# Altium PCB RANGE-FINDER-NODE-PCB.PcbDoc
Units mm, origin at the board's own origin, x right, y up, seen from the top; angles counter-clockwise.
Board outline 30 x 30 mm, 2 copper layers (Top Layer, Bottom Layer), stack 1.671 mm thick; 45 components, 34 nets, 158 pads, 63 vias.
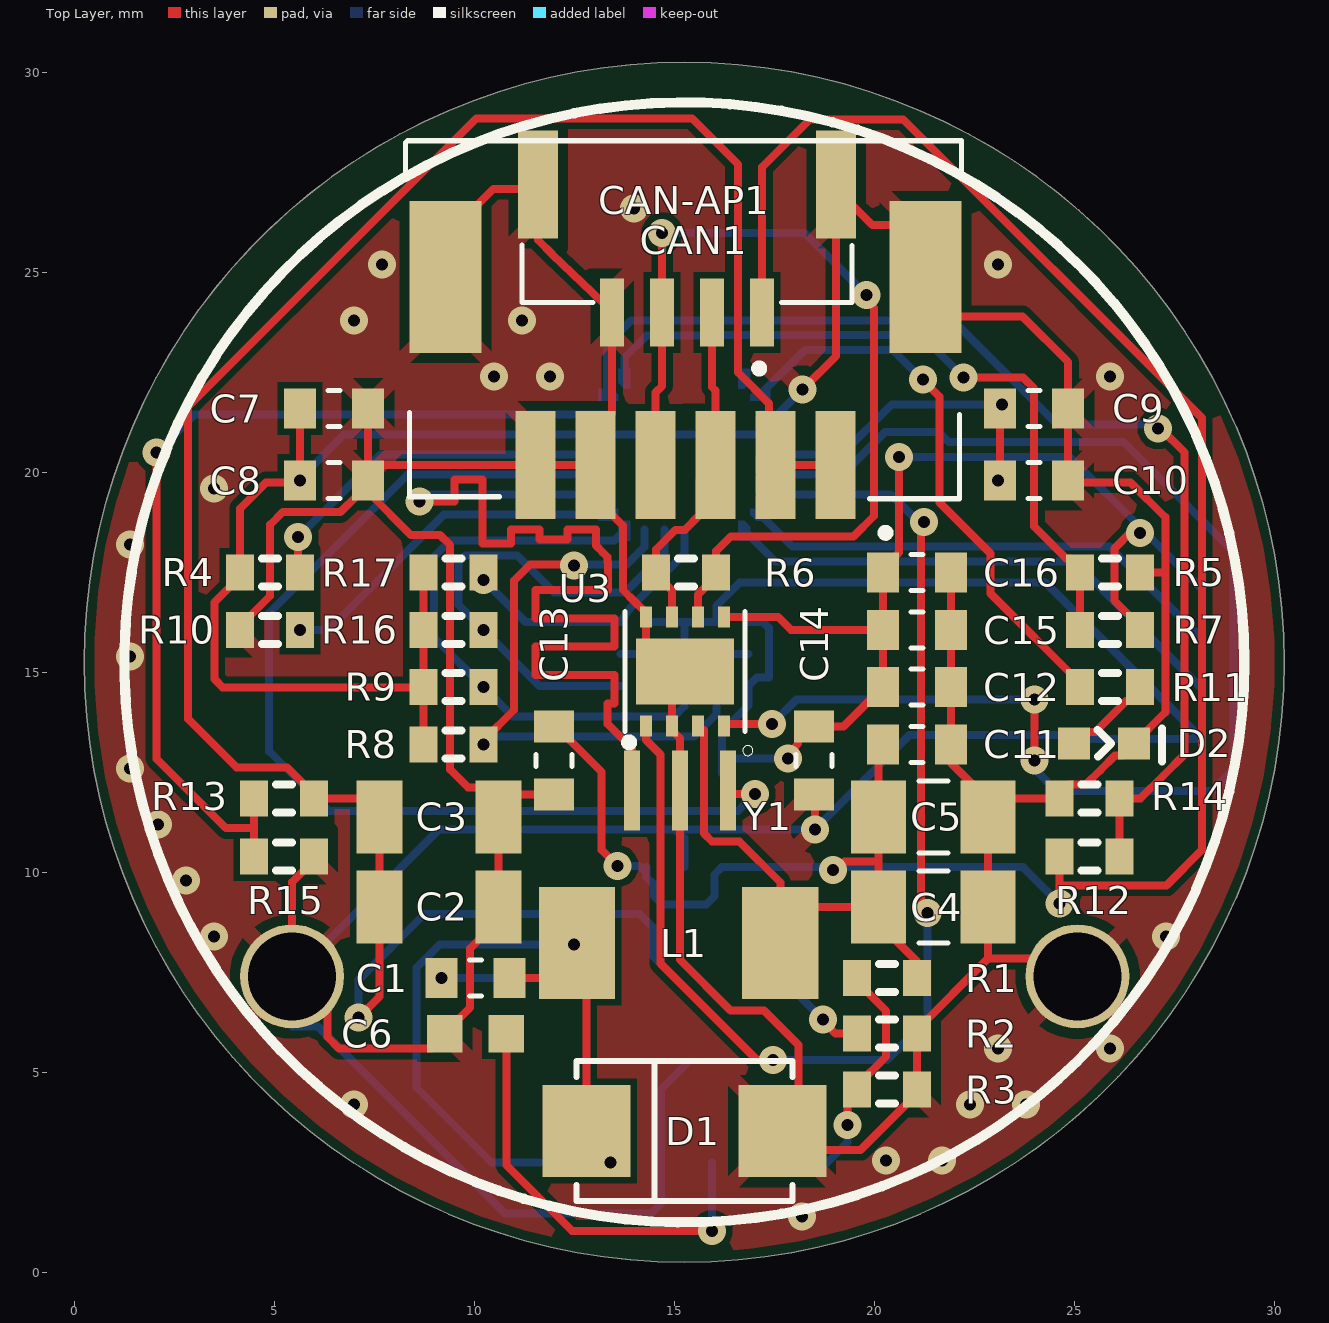
[diagram p0: Top Layer view]
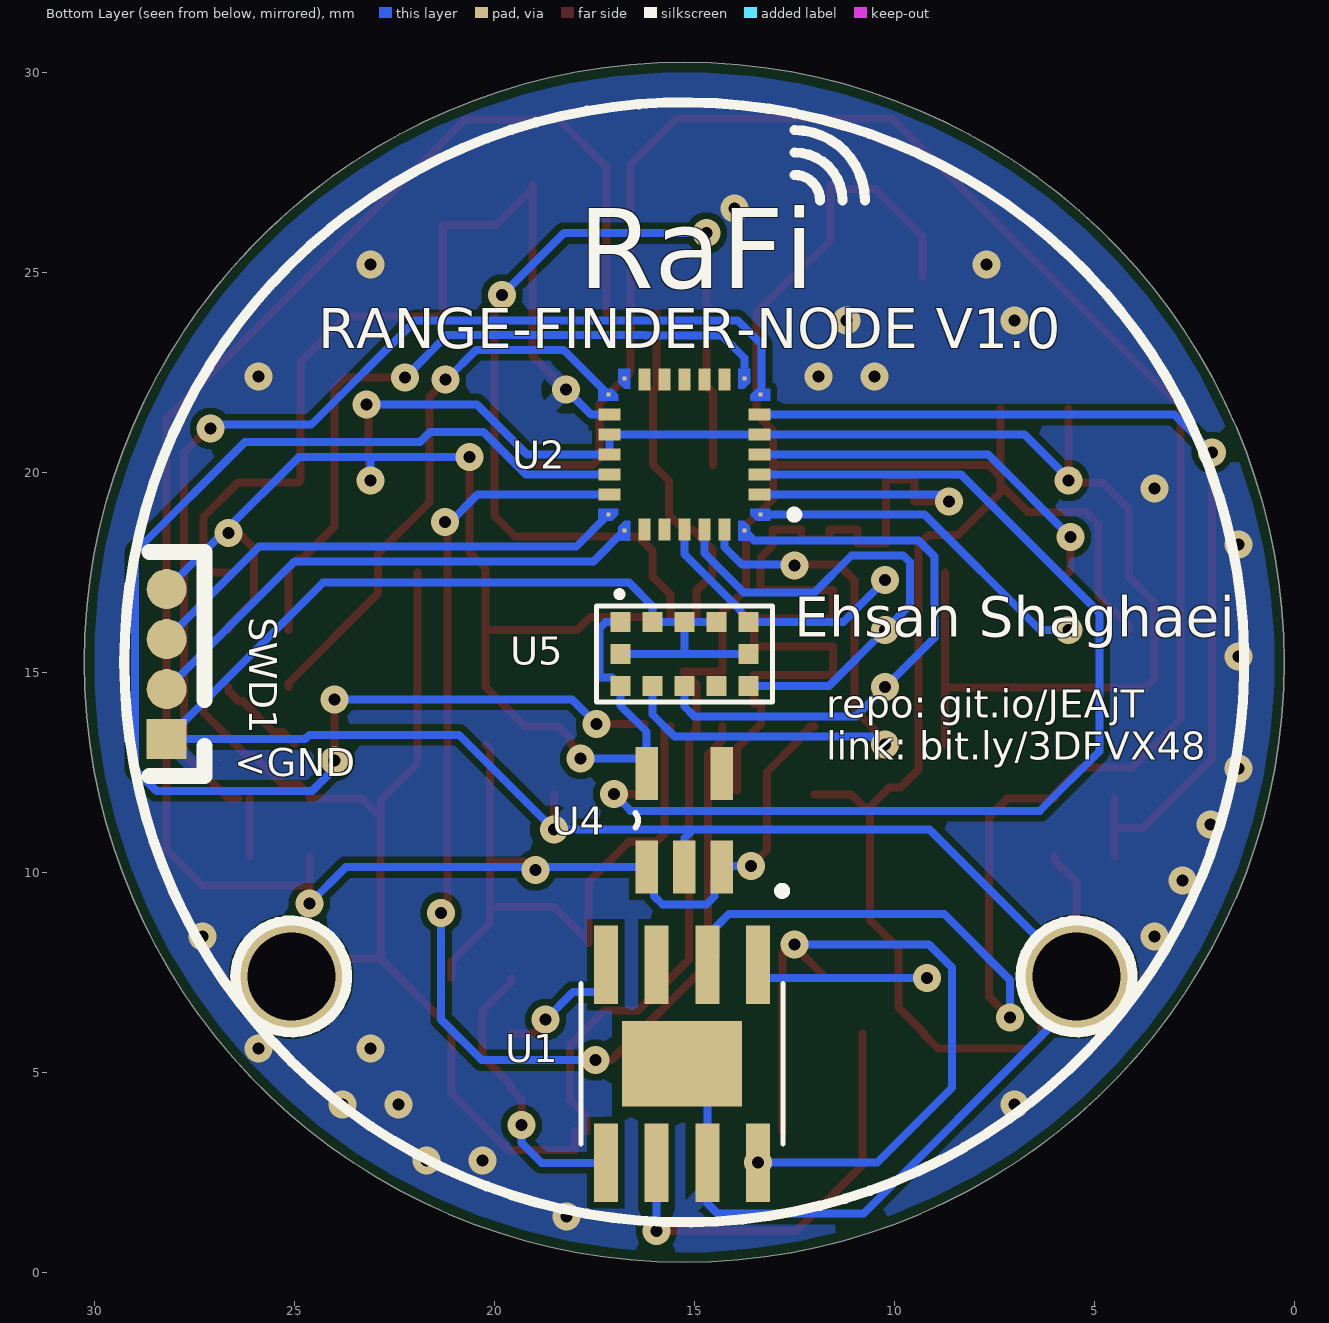
[diagram p1: Bottom Layer view, seen from below]
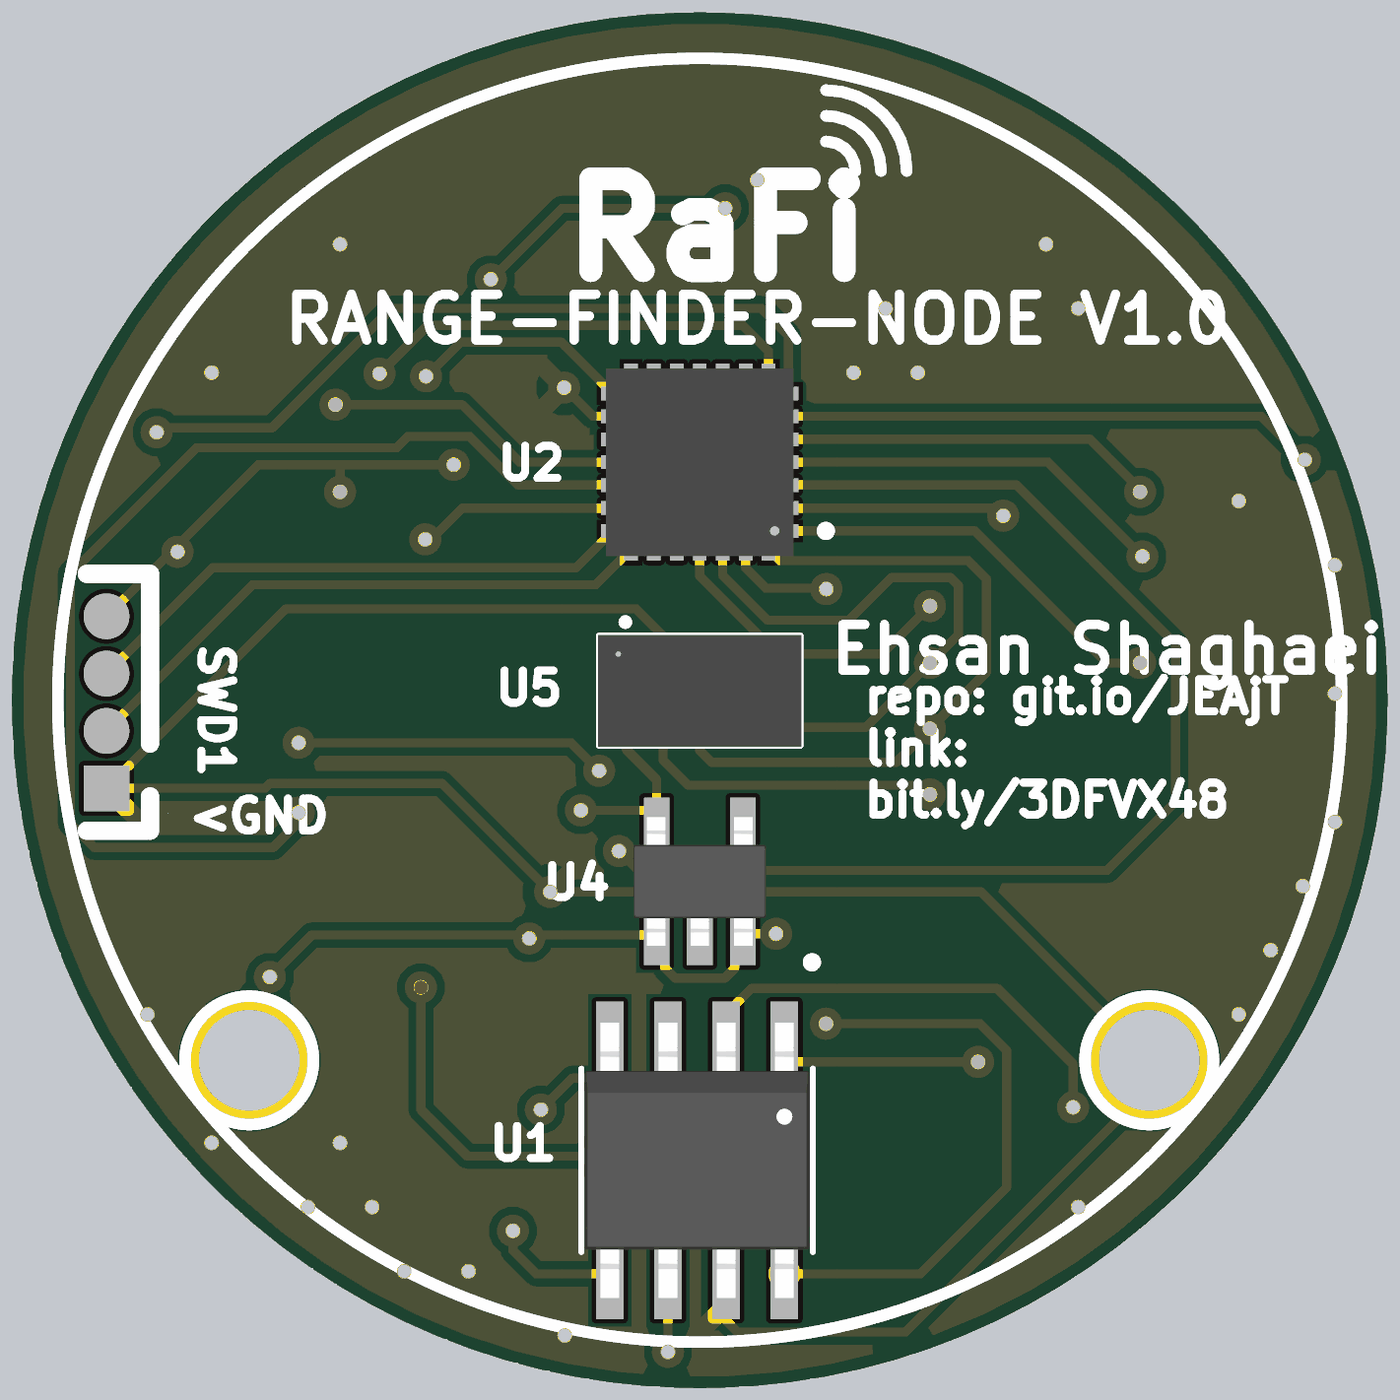
[diagram p2: 3D render of the assembled board from below, using the file's embedded part models]

## Layer stack, top to bottom
Top Solder: solder mask 0.0102, Solder Resist, Dk 3.5
Top Layer: signal copper 0.0356
Dielectric 1: dielectric 1.6, FR-4, Dk 4.8
Bottom Layer: signal copper 0.0356
Bottom Solder: solder mask 0.0102, Solder Resist, Dk 3.5

## Board outline
15.254,0.254 cw(c15.254,15.254) 0.254,15.254 cw(c15.254,15.254) 15.254,30.254 cw(c15.254,15.254) 30.254,15.254 cw(c15.254,15.254)

## Design rules (kind name [scope] priority, off if disabled: settings)
BoardOutlineClearance [All] p1: gap=0.25 ignorepadtopadclearanceinfootprint=FALSE
Clearance [All] p1: gap=0.17 ignorepadtopadclearanceinfootprint=FALSE
ComponentClearance [All] p1: gap=0 collisioncheckmode=3 verticalgap=0 showdistances=FALSE
DiffPairsRouting [All] p1: maxlimit=0.254 minlimit=0.18 mostfreqgap=0.2 toplayer_minwidth=0.2 toplayer_maxwidth=0.2 toplayer_prefwidth=0.2 bottomlayer_minwidth=0.2 bottomlayer_maxwidth=0.2 bottomlayer_prefwidth=0.2 maxuncoupledlength=12.7
FanoutControl Fanout_SOIC [IsSOIC] p3: bgadir=Out bgaviamode=Closest fanoutstyle=Auto fanoutdirection=Alternating viagrid=0.025 // Fanout_SOIC (Default Rule)
FanoutControl Fanout_Small [(CompPinCount < 5)] p4: bgadir=Out bgaviamode=Closest fanoutstyle=Auto fanoutdirection=OutThenIn viagrid=0.025 // Fanout_Small (Default Rule)
FanoutControl Fanout_Default [All] p5: bgadir=In bgaviamode=Closest fanoutstyle=Auto fanoutdirection=Alternating viagrid=0.025 // Fanout_Default (Default Rule)
HoleSize [All] p1: absolutevalues=TRUE maxlimit=4.5 minlimit=0.3 maxpercent=80.000 minpercent=20.000
HoleToHoleClearance [All] p1: gap=0.4 allowstackedmicrovias=TRUE
MatchedLengths [All] p1: tolerance=0.3 checknetsindiffpair=FALSE checkdiffpairvsdiffpair=TRUE checkxsignals=TRUE checkothers=TRUE
MinimumSolderMaskSliver [All] p1: minsoldermaskwidth=0.15
PlaneClearance [All] p1: clearance=0.2
PlaneConnect [All] p1: planeconnectstyle=Relief reliefexpansion=0.5 reliefentries=4 reliefconductorwidth=0.2 reliefairgap=0.25
PolygonConnect PolygonConnect_1 [InNet('GND')] p1: connectstyle=Relief reliefconductorwidth=0.4 reliefentries=4 polygonreliefangle="45 Angle" airgapwidth=0.254
PolygonConnect [All] p2: connectstyle=Relief reliefconductorwidth=0.3 reliefentries=4 polygonreliefangle="90 Angle" airgapwidth=0.16
RoutingCorners [All] p1: cornerstyle=45-Degree minsetback=2.5 maxsetback=2.5
RoutingPriority [All] p1 off: routingpriority=0
RoutingVias [All] p1: holewidth=0.3 width=0.7 viastyle="Through Hole" minholewidth=0.3 minwidth=0.7 maxholewidth=0.8 maxwidth=1.2
SilkToSilkClearance [All] p1: silktosilkclearance=0
SilkToSolderMaskClearance [IsPad] p1: minsilkscreentomaskgap=0 clearancetoexposedcopper=TRUE
SolderMaskExpansion [All] p1: expansion=0.1 istentingtop=FALSE soldermaskfromhole=TRUE
Width [All] p1: maxlimit=5 minlimit=0.17 preferedwidth=0.2
16 further rules are at their usual default settings.

## Classes and differential pairs
net class 6sc: OSC_IN OSC_OUT
net class Route: 3.3 5V ADC_5V ADC_VIN BOOT0 CAN_N CAN_P CAN_RXD CAN_TXD FB INT LED MISO MOSI NetC1_1 NetC1_2 NetC6_2 NetD2_A NetR2_2 NetU1_3 NSS0 NSS1 OSC_IN OSC_OUT SCK SCL SDA STM_NRST SWDIO SWLK VERSION Vin XSHUT
component class VL53L0X: C15 C16 R16 R17 U5
component class STM32F042G6: C7 C8 C9 C10 C11 C12 C13 C14 D2 R4 R5 R6 R7 R8 R9 R10 R11 R12 R13 R14 R15 SWD1 U2 U3 U4 Y1
component class RANGE-FINDER-NODE-SCH: CAN1 CAN-AP1
component class DCDC-LMR16030: C1 C2 C3 C4 C5 C6 D1 L1 R1 R2 R3 U1
differential pair CAN: +CAN_P -CAN_N

## Components (designator, comment, footprint, x,y, rotation, side; value= is the part's Value field where it differs from the comment)
C1 "GX035C104MAT2-500" *CAPC1608X90 10.033,7.366 r180 top value=0.1u
C2 "GRM31CR71H225KA88L" *CAP3216X125N 9.123,9.14 r0 top value=2.2u
C3 "GRM31CR71H225KA88L" *CAP3216X125N 9.123,11.39 r0 top value=2.2u
C4 "GRM31CR61A476KE15L" *CAPC3216X125N 21.479,9.14 r180 top value=47u
C5 "GRM31CR61A476KE15L" *CAPC3216X125N 21.479,11.39 r180 top value=47u
C6 "GRM188R71C105KA12D" CAPC1608X90N 10.033,5.969 r0 top value=1u
C7 "GX035C104MAT2-500" *CAPC1608X90 6.5,21.6 r0 top value=0.1u
C8 "GX035C104MAT2-500" *CAPC1608X90 6.5,19.8 r0 top value=0.1u
C9 "GX035C104MAT2-500" *CAPC1608X90 24,21.6 r0 top value=0.1u
C10 "GX035C104MAT2-500" *CAPC1608X90 24,19.8 r0 top value=0.1u
C11 "GX035C104MAT2-500" *CAPC1608X90 21.07,13.2 r0 top value=0.1u
C12 "GX035C104MAT2-500" *CAPC1608X90 21.07,14.633 r0 top value=0.1u
C13 "GX035C104MAT2-500" *CAPC1608X90 12,12.8 r270 top value=0.1u
C14 "GX035C104MAT2-500" *CAPC1608X90 18.5,12.8 r270 top value=0.1u
C15 "GX035C104MAT2-500" *CAPC1608X90 21.07,16.067 r180 top value=100nF
C16 "GX035C104MAT2-500" *CAPC1608X90 21.07,17.5 r180 top value=4.7uF
CAN1 "502585-0670" MOLEX_502585-0670 15.286,20.393 r180 top
CAN-AP1 "SM04B-GHS-TB(LF)(SN)-" JST_SM04B-GHS-TB(LF)(SN)- 15.325,26.275 r180 top
D1 "SK56" *SMB_P6SMB62AT3G(Primary) 15.254,3.537 r180 top
D2 "0603-LED-BLUE" *LEDM1608X80_LTE-C1906R-14(Primary) 25.75,13.225 r180 top
L1 "IHLP2020BZER100M01" IHLP 15.113,8.236 r180 top
R1 "Res3" J1-0603 20.32,7.366 r0 top value=56k
R2 "Res3" J1-0603 20.32,5.969 r180 top value=56k
R3 "RC0603FR-0710KL" J1-0603 20.32,4.572 r180 top value=10k
R4 "RC0603FR-0710KL" J1-0603 4.9,17.5 r0 top value=10k
R5 "RC0603FR-0710KL" J1-0603 25.9,17.5 r180 top value=10k
R6 "Res3" J1-0603 15.3,17.5 r180 top value=120
R7 "RC0603FR-0710KL" J1-0603 25.9,16.067 r0 top value=10k
R8 "RC0603FR-0710KL" J1-0603 9.483,13.2 r180 top value=10k
R9 "RC0603FR-0710KL" J1-0603 9.483,14.633 r180 top value=10k
R10 "RC0603FR-0710KL" J1-0603 4.9,16.067 r0 top value=10k
R11 "Res3" J1-0603 25.9,14.633 r0 top value=330
R12 "RC0603FR-0710KL" J1-0603 25.38,10.4 r180 top value=10k
R13 "RC0603FR-0710KL" J1-0603 5.25,11.85 r0 top value=180K
R14 "RC0603FR-0710KL" J1-0603 25.38,11.85 r0 top value=10k
R15 "RC0603FR-0710KL" J1-0603 5.25,10.4 r180 top value=10k
R16 "RC0603FR-0710KL" J1-0603 9.483,16.067 r180 top value=10k
R17 "RC0603FR-0710KL" J1-0603 9.483,17.5 r180 top value=10k
SWD1 "BM04B-GHS-TBT(LF)(SN)(N)" JST_PAD 31.544,15.21 r270 bottom
U1 "LMR16030SDDAR" "*SOIC127P600X170-9N - duplicate" 15.312,5.219 r270 bottom
U2 "STM32F042G6U6" STM32F042G6U6_UFQFPN4x4 15.254,20.447 r0 bottom
U3 "TJA1042" SOT782-1 15.271,15.029 r0 top
U4 "SPX3819M5-L-3-3/TR" *SOT95P280X145-5N 15.254,11.303 r90 bottom value=3V3
U5 "VL53L0X" SENSOR_VL53L0X 15.254,15.463 r180 bottom
Y1 "CSTCE8M00G55-R0" *OSC_CSTCE8M00G55-R0 15.141,12.046 r180 top

## Footprints (in the part's own frame and the unit in brackets; to place one, negate y for a bottom-side part, rotate by r counter-clockwise, add the part's x,y. Pads: shape width x height; smd on the part's side, far side on the other; paste and mask are expansions set on the pad)
*CAP3216X125N [mm]
  rect 1.15x1.82 smd: 1(-1.485,0) 2(1.485,0)
  body extent -1.6,-0.8 1.6,0.8, height 1.22
*CAPC1608X90 [mm]
  rect 0.8x1 smd: 1(-0.85,0) 2(0.85,0)
  silkscreen extent -0.15,-0.45 0.15,0.45, body extent -0.8,-0.4 0.8,0.41, height 0.88
*CAPC3216X125N [mm]
  rect 1.38x1.82 smd: 1(-1.369,0) 2(1.369,0)
  silkscreen extent -0.36,-0.9 0.36,0.9, body extent -1.6,-0.87 1.6,0.87, height 1.71
*LEDM1608X80_LTE-C1906R-14(Primary) [mm]
  rect 0.8x0.8 smd: A(0.75,0) C(-0.75,0)
  silkscreen extent -1.45,-0.38 0.16,0.45, body extent -0.8,-0.3 0.8,0.3, height 1.15
*OSC_CSTCE8M00G55-R0 [mm]
  rect 0.4x2 smd: 1(-1.2,0) 2(0,0) 3(1.2,0)
  silkscreen extent -1.83,-1.13 -1.57,-0.87, body extent -1.6,-0.65 1.6,0.65, height 1
*SMB_P6SMB62AT3G(Primary) [mm]
  rect 2.2x2.3 smd: A(-2.45,0) C(2.45,0)
  silkscreen extent -2.7,-1.75 2.7,1.75, body extent -2.72,-1.78 2.72,1.78, height 2.49
"*SOIC127P600X170-9N - duplicate" [mm]
  rect 1.97x0.6 smd: 1(-2.475,1.905) 2(-2.475,0.635) 3(-2.475,-0.635) 4(-2.475,-1.905) 5(2.475,-1.905) 6(2.475,-0.635) 7(2.475,0.635) 8(2.475,1.905)
  rect 2.13x3 smd: 9(0,0)
  silkscreen extent -4.42,-2.53 2,2.6, body extent -3,-2.45 3,2.45, height 1.69
*SOT95P280X145-5N [mil]
  rect 52x22 smd: 1(-46,37) 2(-46,0) 3(-46,-37) 4(46,-37) 5(46,37)
  silkscreen extent -7,46 7,48, body extent -55,-57 55,57, height 57
CAPC1608X90N [mm]
  rect 0.89x0.93 smd: 1(-0.77,0) 2(0.77,0)
  body extent -0.8,-0.4 0.8,0.4, height 0.9
IHLP [mil]
  rect 75x110 smd: 1(-100,0) 2(100,0)
  body extent -100,-100 100,100, height 79
J1-0603 [mm] "Chip Resistor, Body 1.6x0.8mm, IPC High Density"
  rect 0.7x0.9 smd: 1(-0.75,0) 2(0.75,0)
  silkscreen extent -0.2,-0.35 0.2,0.35, body extent -0.85,-0.48 0.85,0.48, height 0.9
JST_PAD [mm]
  rect 1x1 smd: 1(1.875,3.35)
  round 1 smd: 2(0.625,3.35) 3(-0.625,3.35) 4(-1.875,3.35)
  silkscreen extent -2.8,2.92 2.8,4.7
JST_SM04B-GHS-TB(LF)(SN)- [mm]
  rect 0.6x1.7 smd: 1(-1.875,2.275) 2(-0.625,2.275) 3(0.625,2.275) 4(1.875,2.275)
  rect 1x2.7 smd: SH1(-3.725,-0.925) SH2(3.725,-0.925)
  silkscreen extent -4.12,-2.03 4.13,3.77
MOLEX_502585-0670 [mm]
  rect 1x2.7 smd: 1(-3.75,0.2) 2(-2.25,0.2) 3(-0.75,0.2) 4(0.75,0.2) 5(2.25,0.2) 6(3.75,0.2)
  rect 1.8x3.8 smd: P1(-6,-4.5) P2(6,-4.5)
  silkscreen extent -6.9,-7.9 7,2
SENSOR_VL53L0X [mm]
  rect 0.5x0.5 smd: 1(-1.6,0.8) 2(-0.8,0.8) 3(0,0.8) 4(0.8,0.8) 5(1.6,0.8) 6(1.6,0) 7(1.6,-0.8) 8(0.8,-0.8) 9(0,-0.8) 10(-0.8,-0.8) 11(-1.6,-0.8) 12(-1.6,0)
  silkscreen extent -2.2,-1.2 2.2,1.57, body extent -2.22,-1.22 2.22,1.22, height 1.04
SOT782-1 [mm]
  rect 0.3x0.525 smd: 1(-0.975,-1.362) 2(-0.325,-1.362) 3(0.325,-1.362) 4(0.975,-1.362) 5(0.975,1.362) 6(0.325,1.362) 7(-0.325,1.362) 8(-0.975,1.362)
  rect 2.45x1.65 smd paste-2: P$9(0,0)
  silkscreen extent -1.5,-1.88 1.5,1.5, body extent -1.52,-1.52 1.52,1.52, height 0.85
STM32F042G6U6_UFQFPN4x4 [mm]
  rect 0.1x0.1 smd paste-1 mask+0: 1(-1.9,1.5) 7(-1.9,-1.5) 8(-1.5,-1.9) 14(1.5,-1.9) 15(1.9,-1.5) 21(1.9,1.5) 22(1.5,1.9) 28(-1.5,1.9)
  rect 0.55x0.3 smd: 2(-1.875,1) 3(-1.875,0.5) 4(-1.875,0) 5(-1.875,-0.5) 6(-1.875,-1) 16(1.875,-1) 17(1.875,-0.5) 18(1.875,0) 19(1.875,0.5) 20(1.875,1)
  rect 0.3x0.55 smd: 9(-1,-1.875) 10(-0.5,-1.875) 11(0,-1.875) 12(0.5,-1.875) 13(1,-1.875) 23(1,1.875) 24(0.5,1.875) 25(0,1.875) 26(-0.5,1.875) 27(-1,1.875)
  Top Layer region: -1.65,1.5 -1.65,1.35 -2.15,1.35 -2.15,1.65 -1.8,1.65
  Top Layer region: -1.65,-1.5 -1.8,-1.65 -2.15,-1.65 -2.15,-1.35 -1.65,-1.35
  Top Layer region: -1.35,-2.15 -1.65,-2.15 -1.65,-1.8 -1.5,-1.65 -1.35,-1.65
  Top Layer region: 1.65,-1.8 1.65,-2.15 1.35,-2.15 1.35,-1.65 1.5,-1.65
  Top Layer region: 2.15,-1.65 1.8,-1.65 1.65,-1.5 1.65,-1.35 2.15,-1.35
  Top Layer region: 2.15,1.35 1.65,1.35 1.65,1.5 1.8,1.65 2.15,1.65
  Top Layer region: 1.65,1.8 1.5,1.65 1.35,1.65 1.35,2.15 1.65,2.15
  Top Layer region: -1.35,1.65 -1.5,1.65 -1.65,1.8 -1.65,2.15 -1.35,2.15
  silkscreen extent -2.85,1.4 -2.65,1.6, body extent -2.04,-2.04 2.05,2.05, height 0.61

## Part data
C1 C7 C8 C9 C10 C11 C12 C13 C14 C15 C16: "Cap Thin Film 0.1uf 50v 0603", Package="0603 AVX", MF=AVX, Pacage Metric=1608, SnapEDA_Link=https://www.snapeda.com/parts/GX035C104MAT2-500/AVX/view-part/?ref=snap, Type=SMD
  C1 C7 C8 C9 C10 C11 C12 C15 C16: MP="GX035C104MAT2-500 or CL10B104JB8NNNC"
  C13 C14: MP=GX035C104MAT2-500
C2 C3: "1206 2.2 uF 50 V В±10% Tolerance X7R SMT Multilayer Ceramic Capacitor", Package="1206 Murata", MF="Murata Electronics", MP=GRM31CR71H225KA88L, SnapEDA_Link=https://www.snapeda.com/parts/GRM31CR71H225KA88L/Murata%20Electronics%20North%20America/view-part/?ref=snap, Type=SMD
C4 C5: "Multilayer Ceramic Capacitor, GRM Series, 47 - F, - 10%, X5R, 10 V, 1206 [3216 Metric]", Package="1206 Murata Electronics", MF="Murata Electronics", MP=GRM31CR61A476KE15L, SnapEDA_Link=https://www.snapeda.com/parts/GRM31CR61A476KE15L/Murata%20Electronics%20North%20America/view-part/?ref=snap, Type=SMD
C6: "SMD Capacitor X7R(EIA) with Capacitance: 1.0uF Tol. 10%. Rated Voltage: 16Vdc", Package=0603, ChipDip_Link=https://www.chipdip.ru/product/grm188r71c105ka12d, HelpURL=https://static.chipdip.ru/lib/428/DOC005428493.pdf, MF="Murata Electronics", MP=GRM188R71C105KA12D, Pacage Metric=1608, SnapEDA_Link=https://www.snapeda.com/parts/GRM188R71C105KA12D/Murata%20Electronics%20North%20America/view-part/228340/?ref=snap, Type=SMD
CAN1: "1.50mm Pitch, CLIK-Mate PCB Receptacle, Single Row, Surface Mount, Right-Angle, Tin Plating, Positive Lock, 6 Circuits, Natural", Package=None, MF=Molex, MP=502585-0670, SnapEDA_Link=https://www.snapeda.com/parts/502494-0670/Molex/view-part/?ref=snap, System=Connector, Type=SMD
CAN-AP1: "Connector Header Surface Mount, Right Angle 4 position 0.049 _1.25mm_", Package=None, ChipDip_Link=https://www.chipdip.ru/product/sm04b-ghs-tb-lf-sn-gh-1.25mm-header-side-ent, HelpURL=http://www.farnell.com/datasheets/2082975.pdf, MF="JST Sales", MP=SM04B-GHS-TB(LF)(SN), SnapEDA_Link=https://www.snapeda.com/parts/SM04B-GHS-TB%28LF%29%28SN%29-/JST%20Sales%20America%20Inc./view-part/2759740/?ref=snap, System=Connector
D1: "Диод Шоттки 5А 60В [SMB / DO-214AA]", Package="DO-214 Littelfuse", ChipDip_Link=https://www.chipdip.ru/product/sk56, MF="Littelfuse Inc.", MP=SK56, SnapEDA_Link=https://www.snapeda.com/parts/P6SMB62AT3G/Littelfuse%20Inc./view-part/?ref=snap, Type=SMD
D2: library part LTE-C1906R-14, "LED IrLED Chip LED 2-Pin SMD T/R", Package="0603 Lite-On", MP=0603-LED-BLUE, SnapEDA_Link=https://www.snapeda.com/parts/LTE-C1906R-14/Lite-On%20Inc./view-part/?ref=snap, Type=SMD
L1: "10ÂµH Shielded Molded Inductor 2.3A 199mOhm Max Nonstandard", Package="Nonstandard Vishay", ChipDip_Link=https://www.chipdip.ru/product/ihlp2020bzer100m11-inductor-ihlp-smd-2020-10, HelpURL=http://www.vishay.com/docs/34253/ihlp-2020bz-01.pdf, MF="Vishay Dale", MP=IHLP2020BZER100M01, SnapEDA_Link=https://www.snapeda.com/parts/IHLP2020BZER100M01/Vishay%20Dale/view-part/44808/?ref=snap, Type=SMD
R1 R2 R11: "Resistor", Package=R0603, Pacage Metric=1608, Type=SMD
  R1 R2: ChipDip_Link=https://www.chipdip.ru/product0/9000079754, HelpURL=https://www.chipdip.ru/product0/9000079754, MP=RC0603FR-0756KL
  R11: ChipDip_Link=https://www.chipdip.ru/product0/9000079628, HelpURL=https://www.chipdip.ru/product0/9000079628, MP=RC0603FR-07330RL
R3 R4 R5 R7 R8 R9 R10 R12 R13 R14 R15 R16 R17: "10 kOhms 1 0.1 W 1 10 W Chip Resistor 0603 1608 Metric Thick Film", Package=R0603, ChipDip_Link=https://www.chipdip.ru/product0/9000079736, HelpURL=https://www.chipdip.ru/product0/9000079736, MF="Yageo or NXP", MP="10K 1% 0603", Pacage Metric=1608, SnapEDA_Link=https://www.snapeda.com/parts/RC0603FR-0710KL/Yageo/view-part/?ref=dk&t=RC0603FR-0710KL&con_ref=None, Type=SMD
R6: "120 Ohms 1 0.1 W 1 10 W Chip Resistor 0603 1608 Metric Thick Film", Package=R0603, ChipDip_Link=https://www.chipdip.ru/product0/9000079618, HelpURL=https://www.chipdip.ru/product0/9000079618, MP=RC0603FR-07120RL, Pacage Metric=1608, Type=SMD
SWD1: "Conn Shrouded Header HDR 4 POS 1.25mm Solder ST SMD Reel", Package=None, Instructions="Do not install", MF="JST Sales", MP=SM04B-GHS-TB(LF)(SN), SnapEDA_Link=https://www.snapeda.com/parts/BM04B-GHS-TBT%28LF%29%28SN%29%28N%29/JST%20Sales%20America%20Inc./view-part/?ref=snap, System=Connector, Type=SMD
U1: "LMR16030SDDAR, Conv DC-DC 4.3V to 60V Step Down Single-Out 1V to 50V 3A Automotive 8-Pin HSOP EP T/R", Package="PowerSOIC-8 Texas Instruments", ChipDip_Link=https://www.chipdip.ru/product1/8003448566, HelpURL=https://www.ti.com/lit/ds/symlink/lmr16030.pdf, MF="Texas Instruments", MP=LMR16030SDDAR, SnapEDA_Link=https://www.snapeda.com/parts/TPS54560DDA/Texas%20Instruments/view-part/?ref=snap, Type=SMD
U2: "ARMÂ® CortexÂ®-M0 STM32F0 Microcontroller IC 32-Bit 48MHz 32KB _32K x 8_ FLASH 28-UFQFPN _4x4_", Package="UFQFN-28 STMicroelectronics", Availability=Unavailable, ChipDip_Link=https://www.chipdip.ru/product/stm32f042g6u6, Datasheet=https://static.chipdip.ru/lib/914/DOC005914773.pdf, Designer="Ehsan Shaghaei", MF=STMicroelectronics, MP=STM32F042G6U6, Price=None, SnapEDA_Link=https://www.snapeda.com/parts/STM32F042G6U6/STMicroelectronics/view-part/225452/?ref=snap
U3: "1/1 Transceiver Half CANbus 8-SO", Package="VDFN-8 NXP USA", ChipDip_Link=https://www.chipdip.ru/product1/8002840332, HelpURL=https://static.chipdip.ru/lib/583/DOC001583059.pdf, MF="NXP USA", MP=TJA1042, SnapEDA_Link=https://www.snapeda.com/parts/TJA1042/NXP%20USA%20Inc./view-part/900919/?ref=snap, Type=SMD
U4: library part SPX3819M5-L, "Low Dropout Voltage Regulator, Adjustable 0.5A, В±1%, 2.5 to 16 Vin, 5-Pin SOT-23", Package="SOT-23-5 Exar", ChipDip_Link=https://www.chipdip.ru/product1/8003455237, HelpURL=http://www.farnell.com/datasheets/2614478.pdf, MF="MaxLinear, Inc.", MP=SPX3819M5-L-3-3/TR, SnapEDA_Link=https://www.snapeda.com/parts/SPX3819M5-L/MaxLinear%2C%20Inc./view-part/?ref=snap, Type=SMD
U5: "VL53L0X - Light, 3D Time-of-Flight _ToF_ Sensor Evaluation Board", Package=None, Availability=Unavailable, ChipDip_Link=https://www.chipdip.ru/product/vl53l0cxv0dh-1-stm, Datasheet=http://www.farnell.com/datasheets/2291222.pdf, Designer="Ehsan Shaghaei", MF=STMicroelectronics, MP=VL53L0X, Price=None, SnapEDA_Link=https://www.snapeda.com/parts/VL53L0X/STMicroelectronics/view-part/473967/?ref=snap
Y1: "Ceramic Resonator 8MHz ??0.5% _Tol_ ??0.2% _Stability_ 33pF 40Ohm 3-Pin CSMD T/R", Package="SMD-3 Murata", ChipDip_Link=https://www.chipdip.ru/product1/8001783721, HelpURL=https://www.murata.com/en-eu/api/pdfdownloadapi?cate=&partno=CSTCE8M00G55-R0, MF=Murata, MP=CSTCE8M00G55-R0, SnapEDA_Link=https://www.snapeda.com/parts/CSTCE8M00G55-R0/Murata%20Electronics%20North%20America/view-part/?ref=snap, Type=SMD

## Free pads (board coordinates)
  round 2.6 hole 2.2: 1(25.08,7.4) 2(5.45,7.4)

## Via types
v1: diameter 0.7, hole 0.3, Top Layer to Bottom Layer, tented both sides, 63 vias

## Nets (pads, with @x,y where several pads share a name; then routed paths per layer and width w, separated by ;. In a path a pad name is that pad's centre, name@x,y a point inside that pad or via, vN(x,y) a via of type N, cw(c..) or ccw(c..) an arc to the next point about the centre after c; other vN are vias at no path point)
3.3: C7.1 C8.1 C9.1 C10.1 C12.1 C14.1 C15.2 C16.2 R4.1 R7.2 R8.2 R9.2 R16.2 R17.2 SWD1.4 U2.5 U2.17 U2.18 U3.5 U4.5 U5.1 U5.11 | length 71.4
  Top Layer w0.2: C7.1 5.65,19.75 4.799,19.75 4.15,19.101 R4.1 4.15,17.399 3.505,16.754 3.505,14.834 3.708,14.63 R9.2@8.733,14.63 ; R8.2 R9.2@8.733,14.63 ; R17.2 R16.2 R9.2 R9.2@8.733,14.63 ; U3.5 17.598,16.391 17.923,16.067 C15.2 ; v1(17.845,12.852) 17.845,12.965 18.1,13.22 18.1,13.35 18.4,13.65 19.237,13.65 C12.1 C15.2 ; v1(20.621,20.39) 20.621,18.001 20.22,17.6 C15.2 ; C10.1@23.1,19.8 C10.1 C9.1 23.15,21.65 v1(23.2,21.7) ; v1@26.454,18.547 26.01,18.103 26.01,16.795 26.65,16.154 R7.2 ; v1@26.509,18.491 v1(26.645,18.491)
  Bottom Layer w0.2: v1(5.65,19.8) 5.65,19.849 6.748,20.947 U2.5 U2.17 U2.18 19.187,20.447 20.44,21.7 v1(23.2,21.7) ; U4.5 U4.5@16.194,12.852 ; U5.1 17.22,16.263 17.374,16.109 17.374,14.874 17.065,14.874 U5.11 16.854,14.177 16.194,13.517 U4.5@16.194,12.852 ; v1(17.845,12.852) U4.5@16.194,12.852 ; v1(20.621,20.39) 23.1,20.39 ; v1@23.139,19.761 v1(23.1,19.8) 23.1,20.39 ; v1(26.645,18.491) v1@26.788,18.491 ; SWD1.4 v1@26.788,18.491 ; 23.1,20.39 24.889,20.39 v1@26.788,18.491
5V: C4.2 C5.2 C11.1 C13.1 CAN-AP1.1 L1.1 R1.2 R12.2 U3.3 U4.1 U4.3 | length 68.5
  Top Layer w0.2: C13.1 12.1,13.65 12.4,13.35 12.4,13.3 13.183,12.517 13.183,10.566 v1(13.589,10.16) ; U3.3 15.596,13.564 15.748,13.564 15.748,10.973 15.951,10.77 16.637,10.77 17.653,9.754 L1.1@17.653,8.288 ; CAN-AP1.1 17.2,27.635 18.394,28.829 20.724,28.829 28.194,21.359 28.194,10.566 27.305,9.677 24.63,9.677 ; L1.1 L1.1@17.653,8.288 ; v1(18.974,10.058) 19.047,10.058 19.26,10.272 20.11,10.272 ; C11.1 20.11,13.09 C5.2 20.11,10.272 ; R1.2 21.07,7.772 20.11,8.732 C4.2 ; v1(24.63,9.22) 24.63,9.677 ; R12.2 24.63,9.677 ; L1.1@17.653,8.288 18.506,9.14 C4.2 ; C4.2 20.11,10.272
  Bottom Layer w0.2: v1(13.589,10.16) 14.135,10.16 14.314,9.981 U4.3@14.314,9.881 ; U4.3 U4.3@14.314,9.881 ; v1(18.974,10.058) v1@18.898,10.135 ; v1(24.63,9.22) 23.716,10.135 v1@18.898,10.135 ; U4.3@14.314,9.881 14.494,9.701 14.494,9.406 14.705,9.195 15.795,9.195 16.014,9.414 16.014,9.955 U4.1 v1@18.898,10.135
ADC_5V: R12.1 R14.2 U2.7 | length 28.1
  Top Layer w0.2: R12.1 R14.2 ; R14.2@26.398,11.847 26.655,11.847 27.229,12.421 27.757,12.949 27.757,20.504 27.161,21.1 v1(27.1,21.1)
  Bottom Layer w0.2: U2.7 13.323,21.978 13.323,23.206 13.92,23.803 21.974,23.803 24.581,21.196 27.004,21.196 v1(27.1,21.1)
ADC_VIN: R13.1 R15.2 U2.6 | length 24
  Top Layer w0.2: v1(2.057,20.498) 2.057,12.843 3.791,11.109 4.5,11.109 ; R15.2 4.5,11.109 ; R13.1 4.5,11.109
  Bottom Layer w0.2: v1(2.057,20.498) 3.007,21.447 U2.6
BOOT0: R10.2 U2.1 | length 8.9
  Bottom Layer w0.2: v1(5.65,16.067) 6.367,16.067 9.247,18.947 U2.1
CAN_N: CAN1.4 CAN-AP1.3 R6.1 U3.6 | length 23.4
  Top Layer w0.2: CAN1.4 14.536,21.996 14.7,22.161 CAN-AP1.3 v1(14.7,25.984) ; U3.6 15.596,16.946 16.05,17.4 R6.1 16.05,18.034 16.416,18.4 19.482,18.4 20,18.918 20,24.111 19.812,24.299 v1(19.812,24.435)
  Bottom Layer w0.2: v1(14.7,25.984) 18.263,25.984 v1(19.812,24.435)
CAN_P: CAN1.3 CAN-AP1.2 R6.2 U3.7 | length 8.6
  Top Layer w0.2: U3.7 14.946,17.049 14.55,17.445 R6.2 14.55,18.081 15.037,18.567 15.267,18.567 15.636,18.936 15.636,19.793 CAN1.3 16.036,21.4 16.036,22.047 15.95,22.133 15.95,23.5 CAN-AP1.2
CAN_RXD: U2.19 U3.4 | length 34.2
  Top Layer w0.2: U3.4 16.246,13.716 v1(17.45,13.716) ; v1(24.003,12.802) v1(24.003,14.326)
  Bottom Layer w0.2: U2.19 19.21,19.947 20.273,21.01 21.615,21.01 21.865,20.76 26.238,20.76 28.981,18.016 28.981,12.573 28.448,12.04 24.562,12.04 24.003,12.598 v1(24.003,12.802) ; v1(17.45,13.716) 18.059,14.326 v1(24.003,14.326)
CAN_TXD: U2.20 U3.1 | length 31.1
  Top Layer w0.2: U3.1 14.296,13.31 14.656,12.95 14.656,7.724 17.071,5.309 v1(17.475,5.309) ; v1(21.241,18.764) 21.176,18.699 21.176,9.287 21.336,9.127 v1(21.336,8.992)
  Bottom Layer w0.2: U2.20 20.425,19.447 21.107,18.764 v1(21.241,18.764) ; v1(17.475,5.309) 20.32,5.309 21.336,6.325 v1(21.336,8.992)
FB: R1.1 R3.2 U1.5 | length 7.1
  Top Layer w0.2: v1(19.329,3.683) 19.329,4.331 R3.2 19.573,4.58 19.573,4.675 20.3,5.402 20.3,6.536 19.57,7.266 R1.1
  Bottom Layer w0.2: U1.5 18.821,2.743 19.329,3.251 v1(19.329,3.683)
GND: C2.2 C3.2 C4.1 C5.1 C6.1 C7.2 C8.2 C9.2 C10.2 C11.2 C12.2 C13.2 C14.2 C15.1 C16.1 CAN1.5 CAN1.6 CAN1.P1 CAN1.P2 CAN-AP1.4 CAN-AP1.SH1 CAN-AP1.SH2 D1.A D2.C pad.1 pad.2 R2.1 R3.1 R5.1 R10.1 R14.1 R15.1 SWD1.1 U1.7 U1.9 U2.16 U3.2 U3.8 U3.P$9 U4.2 U5.2 U5.3 U5.4 U5.6 U5.12 Y1.2 | length 188.8
  Top Layer w0.2: R10.1 4.15,16.167 4.9,16.917 4.9,18.694 5.215,19.01 6.66,19.01 7.05,19.4 C8.2@7.35,19.7 ; R15.1 6,10.3 5.75,10.05 5.738,10.05 5.45,9.762 pad.2 6.328,6.522 6.328,5.893 6.622,5.598 8.801,5.598 8.806,5.604 8.918,5.604 9.263,5.949 9.263,5.989 9.9,6.626 9.9,8.097 10.608,8.805 C2.2 C3.2@10.608,11.475 ; C8.2@7.35,19.913 C7.2 ; CAN1.P2 9.286,25.893 10.486,27.093 CAN-AP1.SH2@11.6,27.093 ; CAN-AP1.SH2 CAN-AP1.SH2@11.6,27.093 ; C13.2 11.083,11.95 C3.2@10.608,11.475 ; v1(18.212,22.073) 19.05,22.911 CAN-AP1.SH1@19.05,27.093 ; C14.2 18.517,11.95 v1(18.517,11.074) ; CAN-AP1.SH1 CAN-AP1.SH1@19.05,27.093 ; C16.1 C15.1 C12.2 C11.2 21.92,12.739 22.848,11.811 C5.1 ; pad.1 24.633,7.847 22.848,7.847 ; R5.1 27.28,17.5 ; C8.2@7.35,19.7 7.35,19.893 7.65,20.193 CAN1.6 CAN1.5 ; C8.2@7.35,19.7 7.35,19.507 8.417,18.44 9.144,18.44 9.4,18.184 9.4,12.571 9.85,12.121 10.133,12.121 10.608,11.646 C3.2@10.608,11.475 ; CAN-AP1.SH2@11.6,27.093 11.6,25.806 11.956,25.451 13.45,24.024 CAN-AP1.4 13.45,21.457 13.036,21.043 CAN1.5 ; CAN1.5 13.036,19.343 13.436,18.943 13.448,18.943 13.716,18.675 13.716,17.069 14.021,16.764 14.231,16.554 14.246,16.554 14.296,16.504 14.296,15.029 U3.P$9 14.946,14.704 U3.2 14.946,13.554 15.141,13.359 Y1.2 15.141,7.821 16.408,6.553 17.247,6.553 18.11,5.69 18.11,4.318 17.704,3.912 D1.A 17.981,3.537 17.981,3.063 19.661,3.063 21.07,4.472 R3.1 R2.1 21.07,6.069 22.848,7.847 ; CAN-AP1.SH1@19.05,27.093 19.962,26.181 21.286,26.181 CAN1.P1 21.286,23.901 23.707,23.901 24.85,22.758 C9.2 C10.2 24.897,19.753 26.409,19.753 27.28,18.883 27.28,17.5 ; 22.848,7.847 C4.1 C5.1 ; C5.1 23.308,11.85 R14.1 24.63,11.95 24.88,12.2 25.298,12.2 25.653,12.555 26.023,12.925 26.2,12.925 D2.C 27.28,14.005 27.28,17.5
  Bottom Layer w0.2: U5.6 15.254,15.463 ; U5.4 U5.3 ; U4.2 15.254,10.857 15.037,11.074 ; U1.9 14.677,4.584 U1.7 14.677,1.723 14.427,1.473 10.77,1.473 6.096,6.147 5.45,6.147 pad.2 9.124,11.074 15.037,11.074 ; U5.12 15.254,15.463 ; U2.16 17.586,21.447 v1(18.212,22.073) ; 15.037,11.074 v1(18.517,11.074) 20.882,13.44 24.63,13.44 24.735,13.335 SWD1.1 24.282,17.247 16.638,17.247 16.054,16.662 U5.2 U5.3 ; 15.254,15.463 U5.3
  other v1: 18.2,1.4 20.3,2.8 21.7,2.8 7,4.2 22.4,4.2 23.8,4.2 23.1,5.6 25.9,5.6 3.5,8.4 27.3,8.4 2.8,9.8 2.1,11.2 1.4,12.6 1.4,15.4 1.4,18.2 3.5,19.6 10.5,22.4 11.9,22.4 25.9,22.4 7,23.8 11.2,23.8 7.7,25.2 23.1,25.2 14,26.6
INT: R16.1 U2.26 U5.7 | length 12.5
  Bottom Layer w0.2: U5.7 11.637,14.663 v1(10.233,16.067) 9.613,16.687 9.613,17.757 9.786,17.93 11.07,17.93 12,17 13.77,17 14.754,17.984 U2.26
LED: R11.1 U2.15 | length 14.2
  Top Layer w0.2: v1(21.224,22.32) 21.224,22.301 21.63,21.895 21.63,19.252 22.911,17.972 22.911,16.971 25.15,14.732 R11.1
  Bottom Layer w0.2: U2.15 18.27,23.063 20.463,23.063 21.205,22.32 v1(21.224,22.32)
MISO: U2.12
MOSI: U2.13
NetC1_1: C1.1 D1.C L1.2 U1.8 | length 19.7
  Top Layer w0.2: C1.1 11.72,7.366 12.491,8.136 L1.2@12.491,8.236 ; v1(12.5,8.2) 12.537,8.2 L1.2 12.804,8.005 D1.C
  Bottom Layer w0.2: v1(12.5,8.2) 9.14,8.2 8.563,7.623 8.563,4.62 10.439,2.744 v1(13.407,2.744)
NetC1_2: C1.2 U1.1 | length 4.4
  Bottom Layer w0.2: v1(9.183,7.366) 13.207,7.366 13.407,7.566 U1.1
NetC6_2: C6.2 U1.6 | length 10.8
  Top Layer w0.2: C6.2 10.803,2.684 12.446,1.041 v1(15.947,1.041)
  Bottom Layer w0.2: v1(15.947,1.041) U1.6
NetD2_A: D2.A R11.2 | length 2.3
  Top Layer w0.2: D2.A 25.291,13.516 25.533,13.516 26.3,14.283 26.4,14.283 26.65,14.533 R11.2
NetR2_2: R2.2 U1.4 | length 3.5
  Top Layer w0.2: v1(18.72,6.325) 18.72,6.28 19.031,5.969 R2.2
  Bottom Layer w0.2: U1.4 17.217,7.01 18.034,7.01 v1(18.72,6.325)
NetU1_3: U1.3
NSS0: U2.9
NSS1: U2.10
OSC_IN: U2.3 Y1.1 | length 27.1
  Top Layer w0.2: Y1.1 16.341,11.963 v1(17.018,11.963)
  Bottom Layer w0.2: U2.3 8.339,19.947 4.877,16.485 4.877,13.03 6.366,11.541 16.596,11.541 v1(17.018,11.963)
OSC_OUT: U2.2 Y1.3 | length 27
  Top Layer w0.2: v1(8.636,19.279) 9.404,19.279 9.504,19.279 9.504,19.823 10.212,19.823 10.212,18.22 10.92,18.22 10.92,18.573 11.628,18.573 11.628,18.32 12.336,18.32 12.336,18.573 13.044,18.573 13.044,18.173 13.212,18.004 13.335,17.882 13.335,17.867 13.335,17.767 13.346,17.767 13.346,17.059 11.535,17.059 11.535,16.351 13.506,16.351 13.506,15.643 11.535,15.643 11.535,14.935 13.506,14.935 13.506,14.227 13.335,14.227 13.335,14 13.335,13.716 13.941,13.11 Y1.3
  Bottom Layer w0.2: v1(8.636,19.279) 8.804,19.447 U2.2
SCK: U2.11
SCL: R8.1 U2.27 U5.10 | length 15.3
  Top Layer w0.2: v1(10.233,13.2) 10.233,13.3 11,14.067 11,17.3 11.4,17.7 12.474,17.7 v1(12.494,17.68)
  Bottom Layer w0.2: v1(10.233,13.2) 10.368,13.2 10.57,13.402 15.502,13.402 16.054,13.954 U5.10 ; v1(12.494,17.68) 12.514,17.7 13.817,17.7 14.254,18.137 U2.27
SDA: R9.1 U2.28 U5.9 | length 14.7
  Bottom Layer w0.2: U2.28 13.507,18.3 9.4,18.3 9,17.9 9,15.866 v1(10.233,14.633) 10.966,13.9 15,13.9 15.254,14.154 U5.9
STM_NRST: R4.2 U2.4 | length 9.5
  Top Layer w0.2: v1(5.6,18.39) 5.6,17.55 R4.2
  Bottom Layer w0.2: v1(5.6,18.39) 7.657,20.447 U2.4
SWDIO: SWD1.3 U2.21 | length 12.3
  Bottom Layer w0.2: U2.21 17.957,18.144 25.885,18.144 SWD1.3
SWLK: SWD1.2 U2.22 | length 13.1
  Bottom Layer w0.2: U2.22 17.527,17.774 25.005,17.774 SWD1.2
VERSION: R5.2 R7.1 U2.8 | length 18.1
  Top Layer w0.2: v1(22.239,22.377) 23.724,22.377 24,22.101 24,18.65 24.8,17.85 24.9,17.85 25.15,17.6 R5.2 ; R7.1 R5.2@25.15,17.475
  Bottom Layer w0.2: U2.8 13.754,22.867 14.313,23.426 16.23,23.426 16.237,23.433 21.184,23.433 v1(22.239,22.377)
Vin: C2.1 C3.1 CAN1.1 CAN1.2 R13.2 U1.2 | length 55.7
  Top Layer w0.2: v1(7.112,6.375) 7.638,6.901 C2.1 C3.1 7.178,11.85 R13.2 6,11.95 5.326,12.624 4.064,12.624 2.845,13.843 2.845,21.641 10.058,28.854 15.443,28.854 16.6,27.698 16.6,22.5 17.374,21.726 17.374,20.355 CAN1.2 CAN1.1
  Bottom Layer w0.2: v1(7.112,6.375) 7.112,7.315 8.763,8.966 14.134,8.966 14.477,8.623 14.477,7.894 U1.2
XSHUT: R17.1 U2.25 U5.5 | length 6.8
  Bottom Layer w0.2: v1(10.233,17.31) 11.28,16.263 U5.5 13.904,16.612 15.254,17.961 U2.25
pads on no net: U2.14 U2.23 U2.24 U4.4 U5.8

## Polygon pours and split planes (outlines as drawn)
GND on Top Layer "GND_L01_P000" (solid, remove dead copper, pour order 0): 44.4,33.8 44.6,33.6 44.6,0 0,0 0,34 43.9,34 44,34.1
GND on Bottom Layer "GND_L02_P001" (solid, remove dead copper, pour order 1): 39.2,31.4 39,31.2 39,0 0,0 0,34.1 40.8,34.1 42.9,32

## Silkscreen, mask and mechanical layers (free items; w line width, h text height)
Top Overlay:
  circle w0.254: c15.254,15.254 r14
Bottom Overlay:
  circle w0.254: c5.45,7.4 r1.4
  circle w0.254: c25.08,7.4 r1.4
  circle w0.254: c15.254,15.254 r14
  lines w0.254: 10.74,26.8 cw(c12.5,26.8) 12.5,28.56 ; 11.3,26.8 cw(c12.5,26.8) 12.5,28 ; 11.86,26.8 cw(c12.5,26.8) 12.5,27.44
  lines w0.4: 27.244,12.41 27.244,13.156 ; 27.29,18.01 27.933,18.01
  text "RaFi" at 17.906,24.6 h2
  text "RANGE-FINDER-NODE V1.0" at 24.412,23.1 h1
  text "Ehsan Shaghaei" at 12.5,15.897 h1
  text "repo: git.io/JEAjT / link: bit.ly/3DFVX48" at 11.7,12.822 h0.7
  text "<GND" at 26.5,12.4 h0.7
Mechanical 2:
  circle w0.254: c15.254,15.254 r15